# EAGLE board WA-ES_p1_oneside (EAGLE 9.5.0)
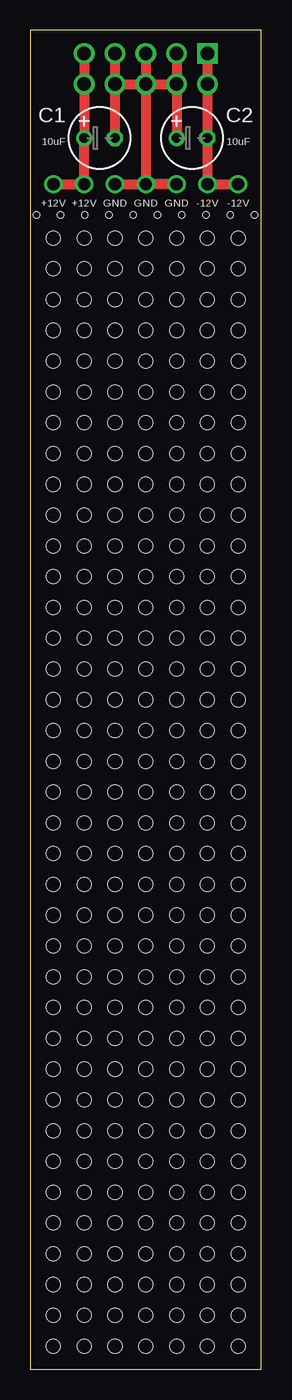
[diagram p0: board, top side]
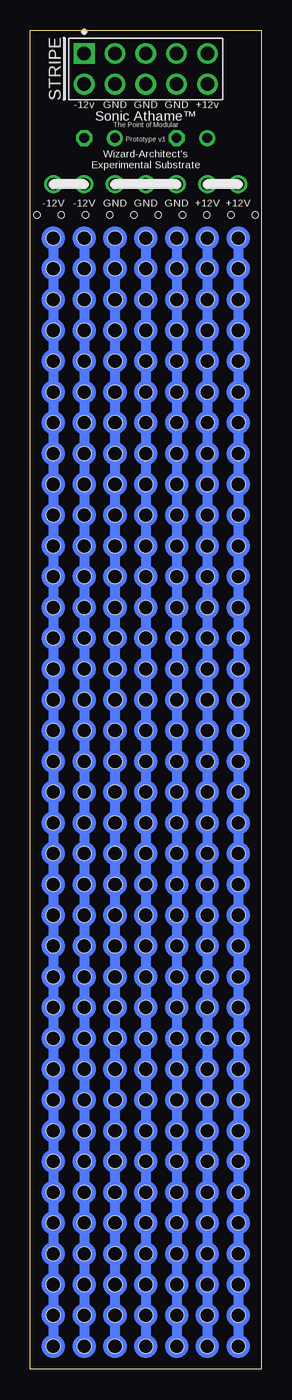
[diagram p1: board, bottom side, seen from below]

Size 19.05 x 110.49 mm. Coordinates in mm from the lower left corner, seen from the top.
Outline: 0,0 19.05,0 19.05,110.49 0,110.49 0,0
Copper layers (1*16): Top 0.035mm / dielectric 1.5mm / Bottom 0.035mm
Design rules "default *": minimum track width 6mil, minimum drill 0.35mm, track to track 6mil, track to pad 6mil, pad to pad 6mil, via to via 6mil, smd to smd 6mil, copper to edge 0.2mm, drill to drill 6mil, minimum pad ring 10mil, minimum via ring 8mil, stop-mask expansion 4mil, vias tented up to drill 0mil, thermal gap 10mil
Holes 1.14 mm at 1.91,93.34 4.45,93.34 6.99,93.34 9.53,93.34 12.06,93.34 14.61,93.34 17.14,93.34 1.91,90.81 4.45,90.81 6.99,90.81 9.53,90.81 12.06,90.81 14.61,90.81 17.14,90.81 1.91,88.27 4.45,88.27 6.99,88.27 9.53,88.27 12.06,88.27 14.61,88.27 17.14,88.27 1.91,85.72 4.45,85.72 6.99,85.72 9.53,85.72 12.06,85.72 14.61,85.72 17.14,85.72 1.91,83.19 4.45,83.19 6.99,83.19 9.53,83.19 12.06,83.19 14.61,83.19 17.14,83.19 1.91,80.64 4.45,80.64 6.99,80.64 9.53,80.64 12.06,80.64 14.61,80.64 17.14,80.64 1.91,78.11 4.45,78.11 6.99,78.11 9.53,78.11 12.06,78.11 14.61,78.11 17.14,78.11 1.91,75.56 4.45,75.56 6.99,75.56 9.53,75.56 12.06,75.56 14.61,75.56 17.14,75.56 1.91,73.03 4.45,73.03 6.99,73.03 9.53,73.03 12.06,73.03 14.61,73.03 17.14,73.03 1.91,70.48 4.45,70.48 6.99,70.48 9.53,70.48 12.06,70.48 14.61,70.48 17.14,70.48 1.91,67.94 4.45,67.94 6.99,67.94 9.53,67.94 12.06,67.94 14.61,67.94 17.14,67.94 1.91,65.41 4.45,65.41 6.99,65.41 9.53,65.41 12.06,65.41 14.61,65.41 17.14,65.41 1.91,62.87 4.45,62.87 6.99,62.87 9.53,62.87 12.06,62.87 14.61,62.87 17.14,62.87 1.91,60.33 4.45,60.33 6.99,60.33 9.53,60.33 12.06,60.33 14.61,60.33 17.14,60.33 1.91,57.78 4.45,57.78 6.99,57.78 9.53,57.78 12.06,57.78 14.61,57.78 17.14,57.78 1.91,55.24 4.45,55.24 6.99,55.24 9.53,55.24 12.06,55.24 14.61,55.24 17.14,55.24 1.91,52.7 4.45,52.7 6.99,52.7 9.53,52.7 12.06,52.7 14.61,52.7 17.14,52.7 1.91,50.16 4.45,50.16 6.99,50.16 9.53,50.16 12.06,50.16 14.61,50.16 17.14,50.16 1.91,47.62 4.45,47.62 6.99,47.62 9.53,47.62 12.06,47.62 14.61,47.62 17.14,47.62 1.91,45.09 4.45,45.09 6.99,45.09 9.53,45.09 12.06,45.09 14.61,45.09 17.14,45.09 1.91,42.55 4.45,42.55 6.99,42.55 9.53,42.55 12.06,42.55 14.61,42.55 17.14,42.55 1.91,40.01 4.45,40.01 6.99,40.01 9.53,40.01 12.06,40.01 14.61,40.01 17.14,40.01 1.91,37.47 4.45,37.47 6.99,37.47 9.53,37.47 12.06,37.47 14.61,37.47 17.14,37.47 1.91,34.92 4.45,34.92 6.99,34.92 9.53,34.92 12.06,34.92 14.61,34.92 17.14,34.92 1.91,32.38 4.45,32.38 6.99,32.38 9.53,32.38 12.06,32.38 14.61,32.38 17.14,32.38 1.91,29.84 4.45,29.84 6.99,29.84 9.53,29.84 12.06,29.84 14.61,29.84 17.14,29.84 1.91,27.3 4.45,27.3 6.99,27.3 9.53,27.3 12.06,27.3 14.61,27.3 17.14,27.3 1.91,24.77 4.45,24.77 6.99,24.77 9.53,24.77 12.06,24.77 14.61,24.77 17.14,24.77 1.91,22.23 4.45,22.23 6.99,22.23 9.53,22.23 12.06,22.23 14.61,22.23 17.14,22.23 1.91,19.68 4.45,19.68 6.99,19.68 9.53,19.68 12.06,19.68 14.61,19.68 17.14,19.68 1.91,17.14 4.45,17.14 6.99,17.14 9.53,17.14 12.06,17.14 14.61,17.14 17.14,17.14 1.91,14.61 4.45,14.61 6.99,14.61 9.53,14.61 12.06,14.61 14.61,14.61 17.14,14.61 1.91,12.06 4.45,12.06 6.99,12.06 9.53,12.06 12.06,12.06 14.61,12.06 17.14,12.06 1.91,9.53 4.45,9.53 6.99,9.53 9.53,9.53 12.06,9.53 14.61,9.53 17.14,9.53 1.91,6.99 4.45,6.99 6.99,6.99 9.53,6.99 12.06,6.99 14.61,6.99 17.14,6.99 1.91,4.45 4.45,4.45 6.99,4.45 9.53,4.45 12.06,4.45 14.61,4.45 17.14,4.45 1.91,1.91 4.45,1.91 6.99,1.91 9.53,1.91 12.06,1.91 14.61,1.91 17.14,1.91
Holes 0.5 mm at 0.5,95.25 2.5,95.25 4.5,95.25 6.5,95.25 8.5,95.25 10.5,95.25 12.5,95.25 14.5,95.25 16.5,95.25 18.5,95.25

## Footprints (pad centres in the part's own frame; a part is rotated, then mirrored left to right if it is on the bottom)
TT2D5 = drill 0.813: + -1.27,0 | drill 0.813 octagon: - 1.27,0
EURO_POWER = drill 1.105 pad 1.705 square: 1 -5.08,1.27 | drill 1.105 pad 1.705: 2 -2.54,1.27; 3 0,1.27; 4 2.54,1.27; 5 5.08,1.27; 6 5.08,-1.27; 7 2.54,-1.27; 8 0,-1.27; 9 -2.54,-1.27; 10 -5.08,-1.27

## Placement (x,y rotation side)
C1  10u  [TT2D5]  5.71,101.6 0 top
C2  10u  [TT2D5]  13.34,101.6 0 top
J1  EURO_POWER  [EURO_POWER]  9.53,107.31 0 bottom

## Library data of the parts
C1 C2 J1 = SonicAthame

## Nets
+12V: C1.+ J1.5 J1.6
-12V: C2.- J1.1 J1.10
GND: C1.- C2.+ J1.2 J1.3 J1.4 J1.7 J1.8 J1.9

## Tracks (layer width: path | path; a pad name or v marks a point on that pad's centre or on a via)
+12V  (via drill 1.02)
  Top 0.813: J1.5 J1.6 C1.+ v4.45,97.79 v1.91,97.79
-12V  (via drill 1.02)
  Top 0.813: J1.1 J1.10 C2.- v14.61,97.79 v17.14,97.79
GND  (via drill 1.02)
  Top 0.813: J1.4 J1.7 | J1.3 J1.8 | J1.2 J1.9 | J1.7 J1.8 | J1.8 J1.9 | J1.7 C1.- | J1.9 C2.+ | J1.8 v9.53,97.79 | v6.99,97.79 v9.53,97.79 | v12.06,97.79 v9.53,97.79
N$1
  Bottom 0.813: 1.91,93.34 1.91,1.91
N$2
  Bottom 0.813: 4.45,93.34 4.45,1.91
N$3
  Bottom 0.813: 6.99,93.34 6.99,1.91
N$4
  Bottom 0.813: 9.53,93.34 9.53,1.91
N$5
  Bottom 0.813: 12.06,93.34 12.06,1.91
N$6
  Bottom 0.813: 14.61,93.34 14.61,1.91
N$7
  Bottom 0.813: 17.14,93.34 17.14,1.91
(copper drawn outside any net)
  shapes: Bottom circle x259

## Text on the board
tNames: 10uF | 10uF | +12V | +12V | GND | GND | GND | -12V | -12V
bNames: Sonic Athame™ | The Point of Modular | Prototype v1 | Wizard-Architect's / Experimental Substrate | +12V | +12V | GND | GND | GND | -12V | -12V